# EAGLE board eRIC dongle (EAGLE 7.2.0)
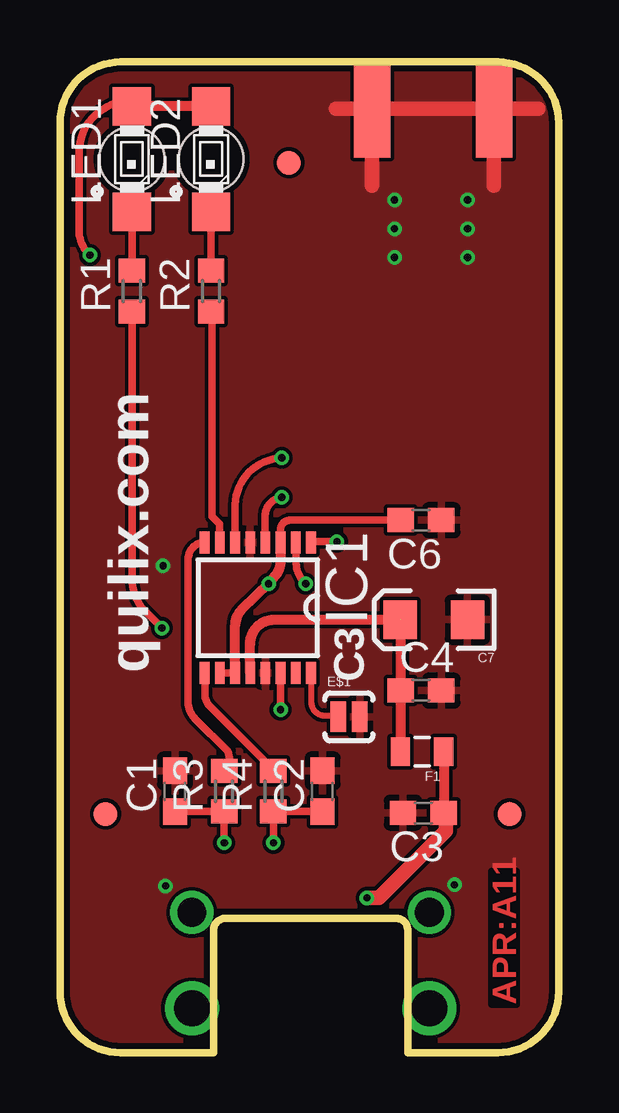
[diagram p0: board, top side]
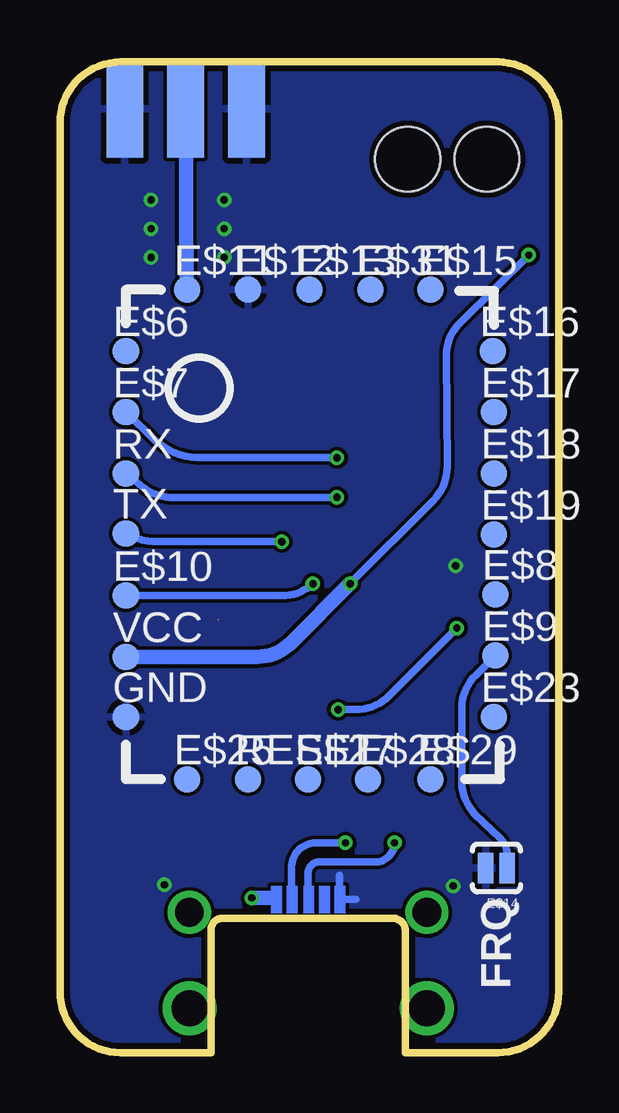
[diagram p1: board, bottom side, seen from below]

Size 20.8 x 41.3 mm. Coordinates in mm from the lower left corner, seen from the top.
Outline: 14.5,0 14.5,5.1 arc90 14.05,5.6 6.9,5.6 arc90 6.4,5.1 6.4,0 2.54,0 arc-90 0,2.54 0,38.76 arc-90 2.54,41.3 18.26,41.3 arc-90 20.8,38.76 20.8,2.54 arc-90 18.26,0 14.5,0
Copper layers (1*2*15*16): Top 0.035mm / dielectric 0.2mm / Route2 0.0175mm / dielectric 1.1mm / Route15 0.0175mm / dielectric 0.2mm / Bottom 0.035mm
Design rules "SeeedStudio_DRU_no_angle_20130527": minimum track width 6mil, minimum drill 12mil, track to track 6mil, track to pad 6mil, pad to pad 6mil, via to via 6mil, smd to smd 0mil, copper to edge 10mil, drill to drill 10mil, minimum pad ring 6mil, minimum via ring 6mil, stop-mask expansion 2mil, vias tented up to drill 25mil, thermal gap 10mil
Net classes: 1 power: width 0.254 mm

## Footprints (pad centres in the part's own frame; a part is rotated, then mirrored left to right if it is on the bottom)
C0603 = smd 1.1 x 1: 1 -0.85,0; 2 0.85,0
EIA3216 = smd 1.4 x 1.6: A 1.4,0; C -1.4,0
SJ_2S-NO = smd 0.635 x 1.27: 1 -0.45,0; 2 0.45,0
TP11R = smd 1.1 x 1.1: TP 0,0
FIDUCIAL = smd 1 x 1: 1 0,0
0805 = smd 0.8 x 1.2: 1 -0.9,0; 2 0.9,0
SSOP16 = smd 0.914 x 0.406: 1 -2.718,2.223; 2 -2.718,1.587; 3 -2.718,0.953; 4 -2.718,0.318; 5 -2.718,-0.318; 6 -2.718,-0.953; 7 -2.718,-1.587; 8 -2.718,-2.223; 9 2.718,-2.223; 10 2.718,-1.587; 11 2.718,-0.953; 12 2.718,-0.318; 13 2.718,0.318; 14 2.718,0.953; 15 2.718,1.587; 16 2.718,2.223
MINI-TOPLED-SANTANA = smd 1.6 x 1.6: A 0,2.2; C 0,-2.2 | hole 2.7: 0,0
R0603 = smd 1 x 1.1: 1 -0.85,0; 2 0.85,0
SMA-EDGE = smd 1.524 x 4.064: GND@0 0,0; GND@1 5.08,0; SIG 2.54,0 | smd 1.524 x 4.064 bottom: GND@2 0,0; GND@3 5.08,0

## Placement (x,y rotation side)
C1  47pF  [C0603]  4.8,10.9 90 top
C2  47pF  [C0603]  10.95,10.9 90 top
C3  10nF  [C0603]  15.15,10 180 top
C4  100nF  [C0603]  15.05,15.1 0 top
C6  100nF  [C0603]  15.05,22.2 180 top
C7  10uF tantalum  [EIA3216]  15.6,18.05 180 top
E$1  [SJ_2S-NO]  12.05,14 0 top
E$6  [TP11R]  18.05,29.25 0 bottom
E$7  [TP11R]  18.05,26.7 0 bottom
E$8  [TP11R]  2.65,19.1 0 bottom
E$9  [TP11R]  2.65,16.55 0 bottom
E$10  [TP11R]  18.05,19.05 0 bottom
E$11  [TP11R]  15.5,31.8 0 bottom
E$12  [TP11R]  12.95,31.8 0 bottom
E$13  [TP11R]  10.4,31.8 0 bottom
E$14  [SJ_2S-NO]  2.6,7.7 180 bottom
E$15  [TP11R]  5.35,31.8 0 bottom
E$16  [TP11R]  2.75,29.25 0 bottom
E$17  [TP11R]  2.7,26.7 0 bottom
E$18  [TP11R]  2.7,24.15 0 bottom
E$19  [TP11R]  2.7,21.6 0 bottom
E$22  [FIDUCIAL]  18.75,9.95 0 top
E$23  [TP11R]  2.7,14 0 bottom
E$25  [TP11R]  15.5,11.4 0 bottom
E$27  [TP11R]  10.45,11.4 0 bottom
E$28  [TP11R]  7.95,11.4 0 bottom
E$29  [TP11R]  5.35,11.4 0 bottom
E$30  [FIDUCIAL]  9.55,37.1 0 top
E$31  [TP11R]  7.85,31.8 0 bottom
E$36  [FIDUCIAL]  1.9,9.95 0 top
F1  FERRITE BEAD  [0805]  15.1,12.55 180 top
GND  [TP11R]  18.05,14 0 bottom
IC1  FT230X SSOP  [SSOP16]  8.25,18.55 270 top
LED1  TOPLED  [MINI-TOPLED-SANTANA]  3,37.25 0 top
LED2  TOPLED  [MINI-TOPLED-SANTANA]  6.3,37.25 0 top
R1  330ohm  [R0603]  3,31.75 90 top
R2  330ohm  [R0603]  6.3,31.75 90 top
R3  27ohm  [R0603]  6.85,10.9 90 top
R4  27ohm  [R0603]  8.9,10.9 90 top
RESET  [TP11R]  12.95,11.4 0 bottom
RX  [TP11R]  18.05,24.15 0 bottom
SMA  SMA-PCB  [SMA-EDGE]  18.1,39.35 0 bottom
TX  [TP11R]  18.05,21.65 0 bottom
VCC  [TP11R]  18.05,16.5 0 bottom

## Library data of the parts
C1-C4 C6 R1-R4 = adafruit
C7 E$22 E$30 E$36 SMA = SparkFun
E$1 E$14 F1 = SparkFun-Capacitors
E$6-E$13 E$15-E$19 E$23 E$25 E$27-E$29 E$31 GND RESET RX TX VCC = testpad
IC1 = ftdichip
LED1 LED2 = led

## Nets
GND: C1.2 C2.2 C3.2 C4.2 C6.1 C7.C E$1.2 E$12.TP E$14.2 GND.TP IC1.5 IC1.13 SMA.GND@0 SMA.GND@1
S$5: C2.1 R4.1
S$6: C1.1 R3.1
S$8: IC1.8 R3.2
S$9: IC1.9 R4.2
S$10: C4.1 C7.A F1.2 IC1.12
S$11: E$7.TP IC1.6
S$15: E$10.TP IC1.2
S$19: E$11.TP SMA.SIG
S$21: IC1.7 R2.1
S$22: C6.2 IC1.3 IC1.10 IC1.11 LED1.A LED2.A VCC.TP
S$24: IC1.14 R1.1
S$25: LED1.C R1.2
S$26: LED2.C R2.2
S$27: IC1.4 RX.TP
S$28: IC1.1 TX.TP
S$29: E$1.1 IC1.16
S$30: E$9.TP E$14.1
S$31: C3.1 F1.1

## Tracks (layer width: path | path; a pad name or v marks a point on that pad's centre or on a via)
GND  (via drill 0.3)
  Top 0.61: 11.5,39.35 19.95,39.35 | 13,38.05 13,36.15 | 18.1,38.05 18.1,36.15
  Bottom 0.305: 9.15,6.45 9.15,7.4 | 9.15,6.4 8.45,6.4
  other vias: 16.45,7 17,34.35 17,33.15 13.95,34.35 13.95,33.15 4.4,6.95 13.95,35.55 17,35.55 4.3,20.3
  pour Top: -0.5,41.75 -0.6,-0.35 21.65,-0.55 21.75,41.55
  pour Bottom: -0.75,41.35 21.75,41.3 21.4,-0.4 -0.5,-0.35 -0.55,37.3
S$2  (via drill 1.5)
  other vias: 15.4,1.85
S$3  (via drill 1.2)
  other vias: 15.4,5.85
S$5
  Top 0.305: R4.1 C2.1
S$6
  Top 0.305: C1.1 R3.1
S$8
  Top 0.305: IC1.8 arc90 5.35,20.59 5.35,14.61 arc45 5.64,13.91 6.98,12.57 arc-45 7.05,12.15 7.08,12.03 arc45 R3.2
S$9
  Top 0.305: IC1.9 arc-45 6.05,15.78 6.05,14.91 arc45 6.24,14.46 8.87,11.83 arc-45 R4.2
S$10  (1 unrouted)
  Top 0.406: F1.2 C4.1 arc90 C4.1 C7.A 12.6,18.05 arc90 12.6,18.05 8.93,18.05 arc90 7.93,17.05 IC1.12
S$11  (via drill 0.3)
  Top 0.305: IC1.6 arc45 IC1.6 7.3,22.65 arc-90 v9.25,24.8
  Bottom 0.305: v9.25,24.8 14.85,24.8 arc45 16.84,25.54 E$7.TP
S$12  (via drill 1.2)
  other vias: 5.5,5.85
S$13  (via drill 1.5)
  other vias: 5.5,1.85
S$15  (via drill 0.3)
  Top 0.305: IC1.2 9.85,20.4 arc48 v10.25,19.55
  Bottom 0.305: E$10.TP 11.54,19.05 arc-42 v10.25,19.55
S$17  (via drill 0.3)
  Top 0.61: 16.1,9.95 16.1,9.3 arc-45 16.07,9.23 13.32,6.48 arc-45 13.25,6.45 v12.8,6.45
  Bottom 0.61: v12.8,6.45 11.95,6.45
S$18  (via drill 0.3)
  Top 0.305: v6.85,8.75 6.85,9.9
  Bottom 0.305: v6.85,8.75 arc90 7.65,7.95 10,7.95 arc-90 10.45,7.45 10.45,6.5
S$19
  Bottom 0.61: E$11.TP SMA.SIG
S$21
  Top 0.305: R2.1 6.35,30.85 6.35,22.35 6.66,22.04 IC1.7
S$22  (via drill 0.3)
  Top 0.305: IC1.11 IC1.10 | IC1.3 arc1 9.2,21.8 arc-90 9.6,22.2 C6.2 | LED1.A 2.9,39.65 arc90 0.8,37.55 0.8,34.18 arc45 v1.25,33.25
  Top 0.406: LED2.A LED1.A | IC1.11 arc45 IC1.11 7.3,17.79 arc-45 7.59,18.49 v8.7,19.55 8.91,19.81 arc45 9.2,20.52 IC1.3
  Bottom 0.305: v8.7,19.55 5.24,23.01 arc-45 4.65,24.43 4.69,29.01 arc46 4.11,30.44 v1.25,33.25
  Bottom 0.61: VCC.TP 12.58,16.5 arc-45 11.16,17.09 v8.7,19.55
S$23  (via drill 0.3)
  Top 0.305: 8.9,9.85 v8.9,8.75
  Bottom 0.305: 11.15,6.45 11.15,6.74 arc-45 11.14,6.79 11.14,7.7 arc90 10.14,8.75 v8.9,8.75
S$24  (via drill 0.3)
  Top 0.305: IC1.14 v9.2,14.3 | v4.25,17.7 3.59,18.36 arc-45 3,19.78 R1.1
  Bottom 0.305: v9.2,14.3 8.48,14.3 arc-45 7.06,14.89 v4.25,17.7
S$25
  Top 0.305: LED1.C R1.2
S$26
  Top 0.305: LED2.C R2.2
S$27  (via drill 0.3)
  Top 0.305: IC1.4 arc-45 8.55,21.31 8.55,22.35 arc-82 v9.25,23.15
  Bottom 0.254: 18.2,24.55 17.95,24.55 RX.TP
  Bottom 0.305: RX.TP 17.49,23.69 arc-45 16.02,23.15 v9.25,23.15
S$28  (via drill 0.3)
  Top 0.305: IC1.1 10.5,21.3 v11.55,21.3
  Bottom 0.254: 18.05,22.05 TX.TP
  Bottom 0.305: TX.TP arc-24 16.9,21.3 v11.55,21.3
S$29
  Top 0.254: IC1.16 10.47,14.63 arc90 11.05,14.05 11.55,14.05 arc-90 E$1.1
S$30
  Bottom 0.305: E$14.1 2.15,8.24 arc-45 2.44,8.94 3.51,9.96 arc45 4.05,11.43 4.05,14.37 arc45 3.46,15.74 E$9.TP
S$31
  Top 0.406: F1.1 C3.1
(copper drawn outside any net)
  shapes: Bottom area x5

## Text on the board
Top: APR:A11
_tsilk: quilix.com | C3
_bsilk: FRQ